# EAGLE board picstick_25k50_v1 (EAGLE 7.2.0)
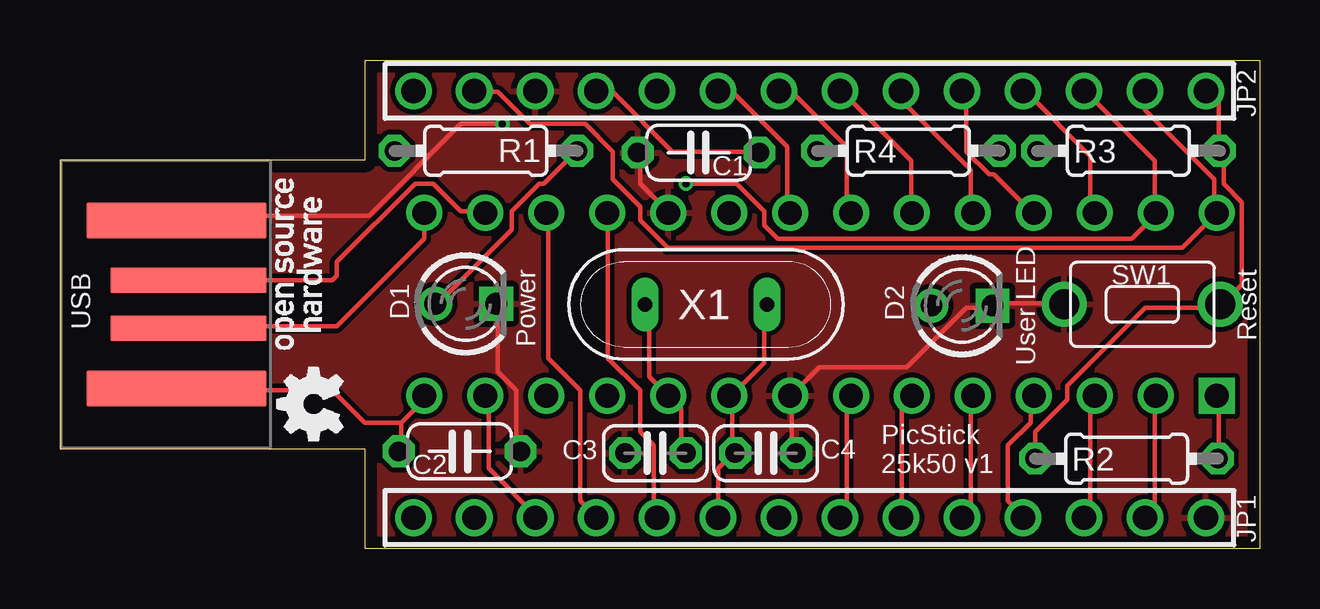
[diagram p0: board, top side]
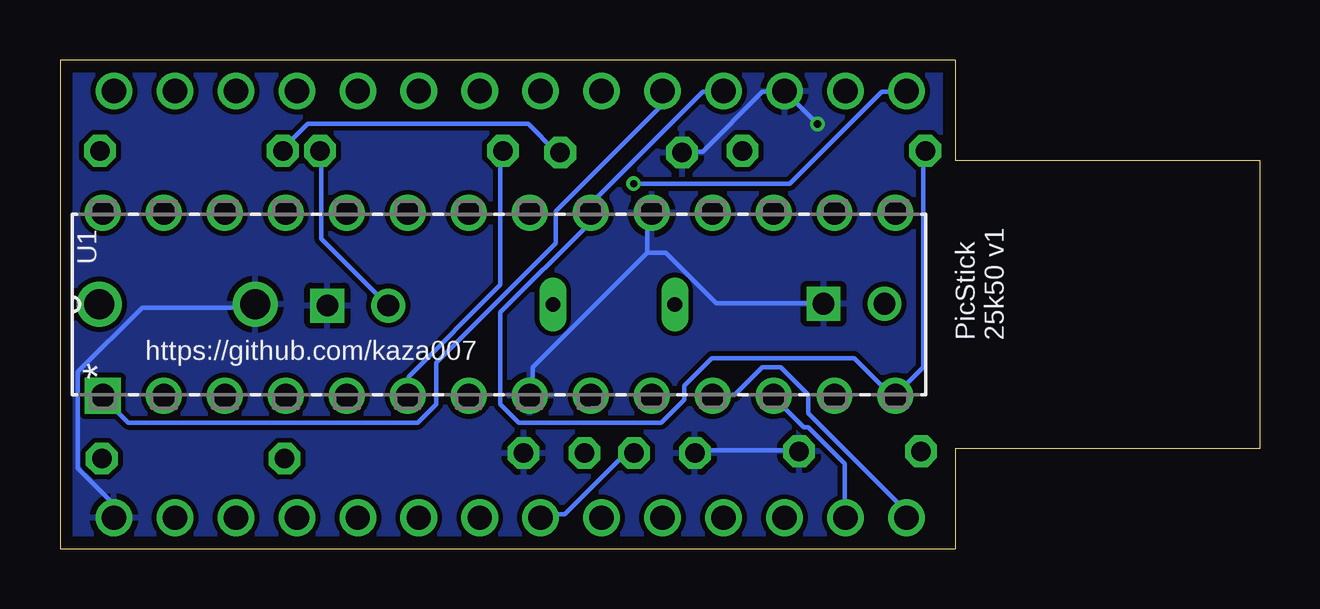
[diagram p1: board, bottom side, seen from below]

Size 49.99 x 20.37 mm. Coordinates in mm from the lower left corner, seen from the top.
Outline: 0,4.18 12.69,4.18 12.69,0 49.99,0 49.99,20.37 12.69,20.37 12.69,16.19 0,16.19 0,4.18
Outline: 0,4.18 0,4.18
Copper layers (1*16): Top 0.035mm / dielectric 1.9mm / Bottom 0.035mm
Design rules "ShenZhen2U EagleRules *": minimum track width 7mil, minimum drill 12mil, track to track 7mil, track to pad 7mil, pad to pad 7mil, via to via 7mil, smd to smd 0mil, copper to edge 20mil, drill to drill 10mil, minimum pad ring 10mil, minimum via ring 6mil, stop-mask expansion 2mil, vias tented up to drill 25mil, thermal gap 10mil
Net classes: 0 default: clearance 0.205 mm

## Footprints (pad centres in the part's own frame; a part is rotated, then mirrored left to right if it is on the bottom)
C050-024X044 = drill 0.813 octagon: 1 -2.54,0; 2 2.54,0
C025-024X044 = drill 0.813 octagon: 1 -1.27,0; 2 1.27,0
LED3MM = drill 0.9: A -1.27,0 | drill 0.9 square: K 1.27,0
FREETRONICS-JON_1X14 = drill 1.016: 1 0,0; 2 2.54,0; 3 5.08,0; 4 7.62,0; 5 10.16,0; 6 12.7,0; 7 15.24,0; 8 17.78,0; 9 20.32,0; 10 22.86,0; 11 25.4,0; 12 27.94,0; 13 30.48,0; 14 33.02,0
0204/7 = drill 0.813 octagon: 1 -3.81,0; 2 3.81,0
SKHLAAA010 = drill 1.25: 1 -3.25,0; 2 3.25,0
DIP254P762X406-28P = drill 0.991 square: 1 -3.81,16.51 | drill 0.991: 2 -3.81,13.97; 3 -3.81,11.43; 4 -3.81,8.89; 5 -3.81,6.35; 6 -3.81,3.81; 7 -3.81,1.27; 8 -3.81,-1.27; 9 -3.81,-3.81; 10 -3.81,-6.35; 11 -3.81,-8.89; 12 -3.81,-11.43; 13 -3.81,-13.97; 14 -3.81,-16.51; 15 3.81,-16.51; 16 3.81,-13.97; 17 3.81,-11.43; 18 3.81,-8.89; 19 3.81,-6.35; 20 3.81,-3.81; 21 3.81,-1.27; 22 3.81,1.27; 23 3.81,3.81; 24 3.81,6.35; 25 3.81,8.89; 26 3.81,11.43; 27 3.81,13.97; 28 3.81,16.51
FREETRONICS-MASTER-V1_USB-A-PCB = smd 7.5 x 1.5: 5V -0.2,-3.5; GND -0.2,3.5 | smd 6.5 x 1.067: USB_M 0.3,-1; USB_P 0.3,1
QS = drill 0.61 long: 1 -2.54,0; 2 2.54,0

## Placement (x,y rotation side)
C1  100nF  [C050-024X044]  26.61,16.51 180 top
C2  220nF  [C050-024X044]  16.65,4.06 0 top
C3  22pF  [C025-024X044]  24.81,3.99 180 top
C4  22pF  [C025-024X044]  29.4,3.99 0 top
D1  Power  [LED3MM]  16.91,10.21 0 top
D2  User LED  [LED3MM]  37.58,10.13 0 top
JP1  [FREETRONICS-JON_1X14]  47.74,1.3 180 top
JP2  [FREETRONICS-JON_1X14]  47.74,19.08 180 top
R1  470R  [0204/7]  17.74,16.59 180 top
R2  470R  [0204/7]  44.44,3.76 180 top
R3  10K  [0204/7]  44.52,16.59 180 top
R4  470R  [0204/7]  35.35,16.59 180 top
SW1  Reset  [SKHLAAA010]  45.1,10.19 0 top
U1  PIC18F25K50-I/SP  [DIP254P762X406-28P]  31.69,10.19 90 bottom
USB  [FREETRONICS-MASTER-V1_USB-A-PCB]  5.05,10.19 0 top
X1  XTAL  [QS]  26.91,10.19 180 top

## Library data of the parts
C1-C4 R1-R4 = rcl
D1 D2 = gm-diodes
JP1 JP2 USB = LeoStick
SW1 = alps
U1 = arthur; MPN: PIC18F25K50-I/SP; OC_FARNELL: 2305832; OC_NEWARK: 06W2973; PACKAGE: 28SPDIP; SUPPLIER: Microchip
X1 = special

## Nets
D+: U1.16 USB.USB_P
D-: U1.15 USB.USB_M
GND: C1.2 C2.2 C3.2 C4.2 D1.K D2.K JP1.1 JP2.12 SW1.1 U1.8 U1.19 USB.GND
MCLR: JP2.10 R2.1 U1.1
N$1: D1.A R1.1
N$6: D2.A R4.1
RA0: JP1.2 U1.2
RA1: JP1.3 U1.3
RA2: JP1.4 U1.4
RA3: JP1.5 U1.5
RA4: JP1.6 R4.2 U1.6
RA5: JP1.7 U1.7
RA6: C3.1 JP1.8 U1.10 X1.2
RA7: C4.1 JP1.9 U1.9 X1.1
RB0: JP2.9 U1.21
RB1: JP2.8 U1.22
RB2: JP2.7 U1.23
RB3: JP2.6 U1.24
RB4: JP2.5 U1.25
RB5: JP2.4 U1.26
RB6: JP2.3 JP2.14 U1.27
RB7: JP2.2 JP2.13 U1.28
RC0: JP1.14 U1.11
RC1: JP1.13 U1.12
RC2: JP1.12 U1.13
RC6: JP1.11 U1.17
RC7: JP1.10 U1.18
RESET_SW: JP2.1 R2.2 R3.1 SW1.2
VDD: C1.1 C2.1 JP2.11 R1.2 R3.2 U1.14 U1.20 USB.5V

## Tracks (layer width: path | path; a pad name or v marks a point on that pad's centre or on a via)
D+
  Top 0.178: U1.16 17.66,14.07 16.71,14.07 15.56,15.22 14.79,15.22 11.54,11.96 11.54,11.39 11.35,11.2 5.42,11.2 USB.USB_P
D-
  Top 0.178: U1.15 15.18,13.88 15.18,12.92 11.54,9.28 5.42,9.28 USB.USB_M
GND  (via drill 0.3)
  Top 0.178: SW1.1 41.78,10.24 38.91,10.24 D2.K 38.72,10.05 37.76,10.05 35.27,7.56 31.64,7.56 30.49,6.41 U1.8 30.49,6.22 30.49,4.11 C4.2 | D1.K 18.24,10.05 18.24,7.37 19,6.6 19,4.11 C2.2 | C1.2 24.17,16.36 24.17,15.22 25.32,14.07 U1.19 | v18.43,17.7 16.71,17.7 12.88,13.88 5.03,13.88 USB.GND
  Bottom 0.178: JP1.1 47.91,1.44 47.91,2.01 49.25,3.35 49.25,7.37 46.57,10.05 41.97,10.05 SW1.1 | C2.2 19.2,4.11 23.41,4.11 C3.2 | C1.2 23.98,16.56 23.22,16.56 20.73,19.04 19.96,19.04 JP2.12 v18.43,17.7 | 25.51,12.34 30.3,7.56 30.3,6.41 U1.8 | 25.51,12.34 25.51,13.88 U1.19 | 25.51,12.34 24.75,12.34 22.64,10.24 18.24,10.24 D1.K
  pour Bottom: 8.88,16.03 12.94,16.03 12.94,20.09 49.77,20.09 49.77,0.28 12.94,0.28 12.94,4.34 8.88,4.34
  pour Top: 8.88,16.03 12.94,16.03 12.94,20.09 49.77,20.09 49.77,0.28 12.94,0.28 12.94,4.34 8.88,4.34
MCLR
  Top 0.178: R2.1 48.29,3.92 48.29,6.22 U1.1
  Bottom 0.178: JP2.10 24.94,19.04 24.94,18.47 29.34,14.07 29.34,12.73 34.32,7.75 34.32,6.03 35.08,5.26 47.14,5.26 48.1,6.22 U1.1
N$1
  Top 0.178: R1.1 21.49,16.56 20.15,15.22 19.96,15.22 18.81,14.07 18.81,13.3 15.75,10.24 D1.A
N$6
  Bottom 0.178: R4.1 39.1,16.56 39.1,12.92 36.42,10.24 D2.A
RA0
  Top 0.178: U1.2 45.61,6.22 45.61,1.82 45.23,1.44 JP1.2
RA1
  Top 0.178: U1.3 42.93,6.22 42.93,1.63 42.74,1.44 JP1.3
RA2
  Top 0.178: U1.4 40.44,6.22 40.44,5.26 39.48,4.31 39.48,2.01 40.06,1.44 JP1.4
RA3
  Top 0.178: U1.5 37.95,6.22 37.95,1.63 37.76,1.44 JP1.5
RA4
  Top 0.178: JP1.6 35.08,1.44 35.08,5.84 35.46,6.22 U1.6
  Bottom 0.178: R4.2 31.64,16.56 31.64,11.01 35.46,7.18 35.46,6.41 U1.6
RA5
  Top 0.178: U1.7 32.79,6.22 32.79,1.63 32.59,1.44 JP1.7
RA6
  Top 0.178: X1.2 24.55,10.05 24.55,7.18 25.32,6.41 U1.10 25.51,6.22 25.89,5.84 25.89,4.11 C3.1
  Bottom 0.178: JP1.8 29.91,1.44 28.96,1.44 26.47,3.92 26.09,3.92 C3.1
RA7
  Top 0.178: X1.1 29.34,10.05 29.34,7.75 28,6.41 U1.9 28,6.22 28,4.11 C4.1 28,3.92 27.43,3.35 27.43,1.44 JP1.9
RB0
  Top 0.178: U1.21 30.3,14.07 30.3,16.75 28,19.04 27.43,19.04 JP2.9
RB1
  Top 0.178: U1.22 32.79,14.07 32.79,16.75 30.49,19.04 30.11,19.04 JP2.8
RB2
  Top 0.178: U1.23 35.46,14.07 35.46,16.17 32.59,19.04 JP2.7
RB3
  Top 0.178: U1.24 37.95,14.07 37.95,15.79 35.08,18.66 35.08,19.04 JP2.6
RB4
  Top 0.178: U1.25 40.44,14.07 38.91,15.6 38.72,15.6 37.76,16.56 37.76,19.04 JP2.5
RB5
  Top 0.178: U1.26 42.93,14.07 42.93,16.36 40.25,19.04 JP2.4
RB6  (via drill 0.3)
  Top 0.178: JP2.3 42.74,19.04 45.61,16.17 45.61,14.07 U1.27 45.61,13.88 44.65,12.92 29.91,12.92 29.34,13.49 29.34,14.07 28.19,15.22 v26.09,15.22
  Bottom 0.178: v26.09,15.22 19.58,15.22 15.75,19.04 14.79,19.04 JP2.14
RB7
  Top 0.178: JP2.2 45.23,19.04 45.23,18.28 48.1,15.41 48.1,14.07 U1.28 48.1,13.88 46.76,12.54 25.32,12.54 24.17,13.68 24.17,14.26 23.02,15.41 23.02,16.56 21.88,17.7 19.58,17.7 18.24,19.04 17.28,19.04 JP2.13
RC0
  Bottom 0.178: U1.11 22.64,6.41 21.88,6.41 20.73,7.56 19.96,7.56 18.81,6.41 18.81,5.65 14.6,1.44 JP1.14
RC1
  Bottom 0.178: U1.12 20.15,6.22 19,5.07 18.81,5.07 17.28,3.54 17.28,1.44 JP1.13
RC2
  Top 0.178: U1.13 17.86,6.22 17.86,3.35 19.77,1.44 JP1.12
RC6
  Top 0.178: U1.17 20.34,13.88 20.34,7.94 21.68,6.6 21.68,2.01 22.26,1.44 JP1.11
RC7
  Top 0.178: U1.18 22.83,13.88 22.83,7.94 24.17,6.6 24.17,4.88 24.75,4.31 24.75,1.44 JP1.10
RESET_SW
  Top 0.178: JP2.1 47.91,19.04 48.29,18.66 48.29,16.75 R3.1 48.48,16.56 48.48,15.22 49.25,14.45 49.25,11.01 48.48,10.24 SW1.2 48.29,10.05 45.23,10.05 41.97,6.79 41.97,6.22 40.63,4.88 40.63,3.92 R2.2
VDD
  Top 0.178: C1.1 29.15,16.56 25.51,16.56 23.02,19.04 22.45,19.04 JP2.11 | 14.22,5.26 14.22,4.11 C2.1 | 14.22,5.26 15.18,6.22 U1.14 | 14.22,5.26 12.69,5.26 11.35,6.6 5.03,6.6 USB.5V
  Bottom 0.178: R3.2 40.63,16.75 39.68,17.7 30.49,17.7 29.34,16.56 C1.1 | JP2.11 22.45,19.04 23.22,19.04 27.81,14.45 27.81,14.07 U1.20 28,13.88 28,13.49 31.64,9.86 31.64,6.03 30.87,5.26 24.94,5.26 23.98,6.22 23.98,6.79 22.83,7.94 16.9,7.94 15.37,6.41 U1.14 15.18,6.41 14.03,7.56 14.03,16.56 R1.2

## Text on the board
tPlace: SW1 | Power | Reset | User LED | PicStick / 25k50 v1
bPlace: PicStick / 25k50 v1 | https://github.com/kaza007